# Altium PCB PanneauLed.PCBDOC
Units mm, origin at the board's own origin, x right, y up, seen from the top; angles counter-clockwise.
Board outline 299.72 x 199.9 mm, 2 copper layers (Top Layer, Bottom Layer); 100 components, 80 nets, 206 pads, 4 vias.
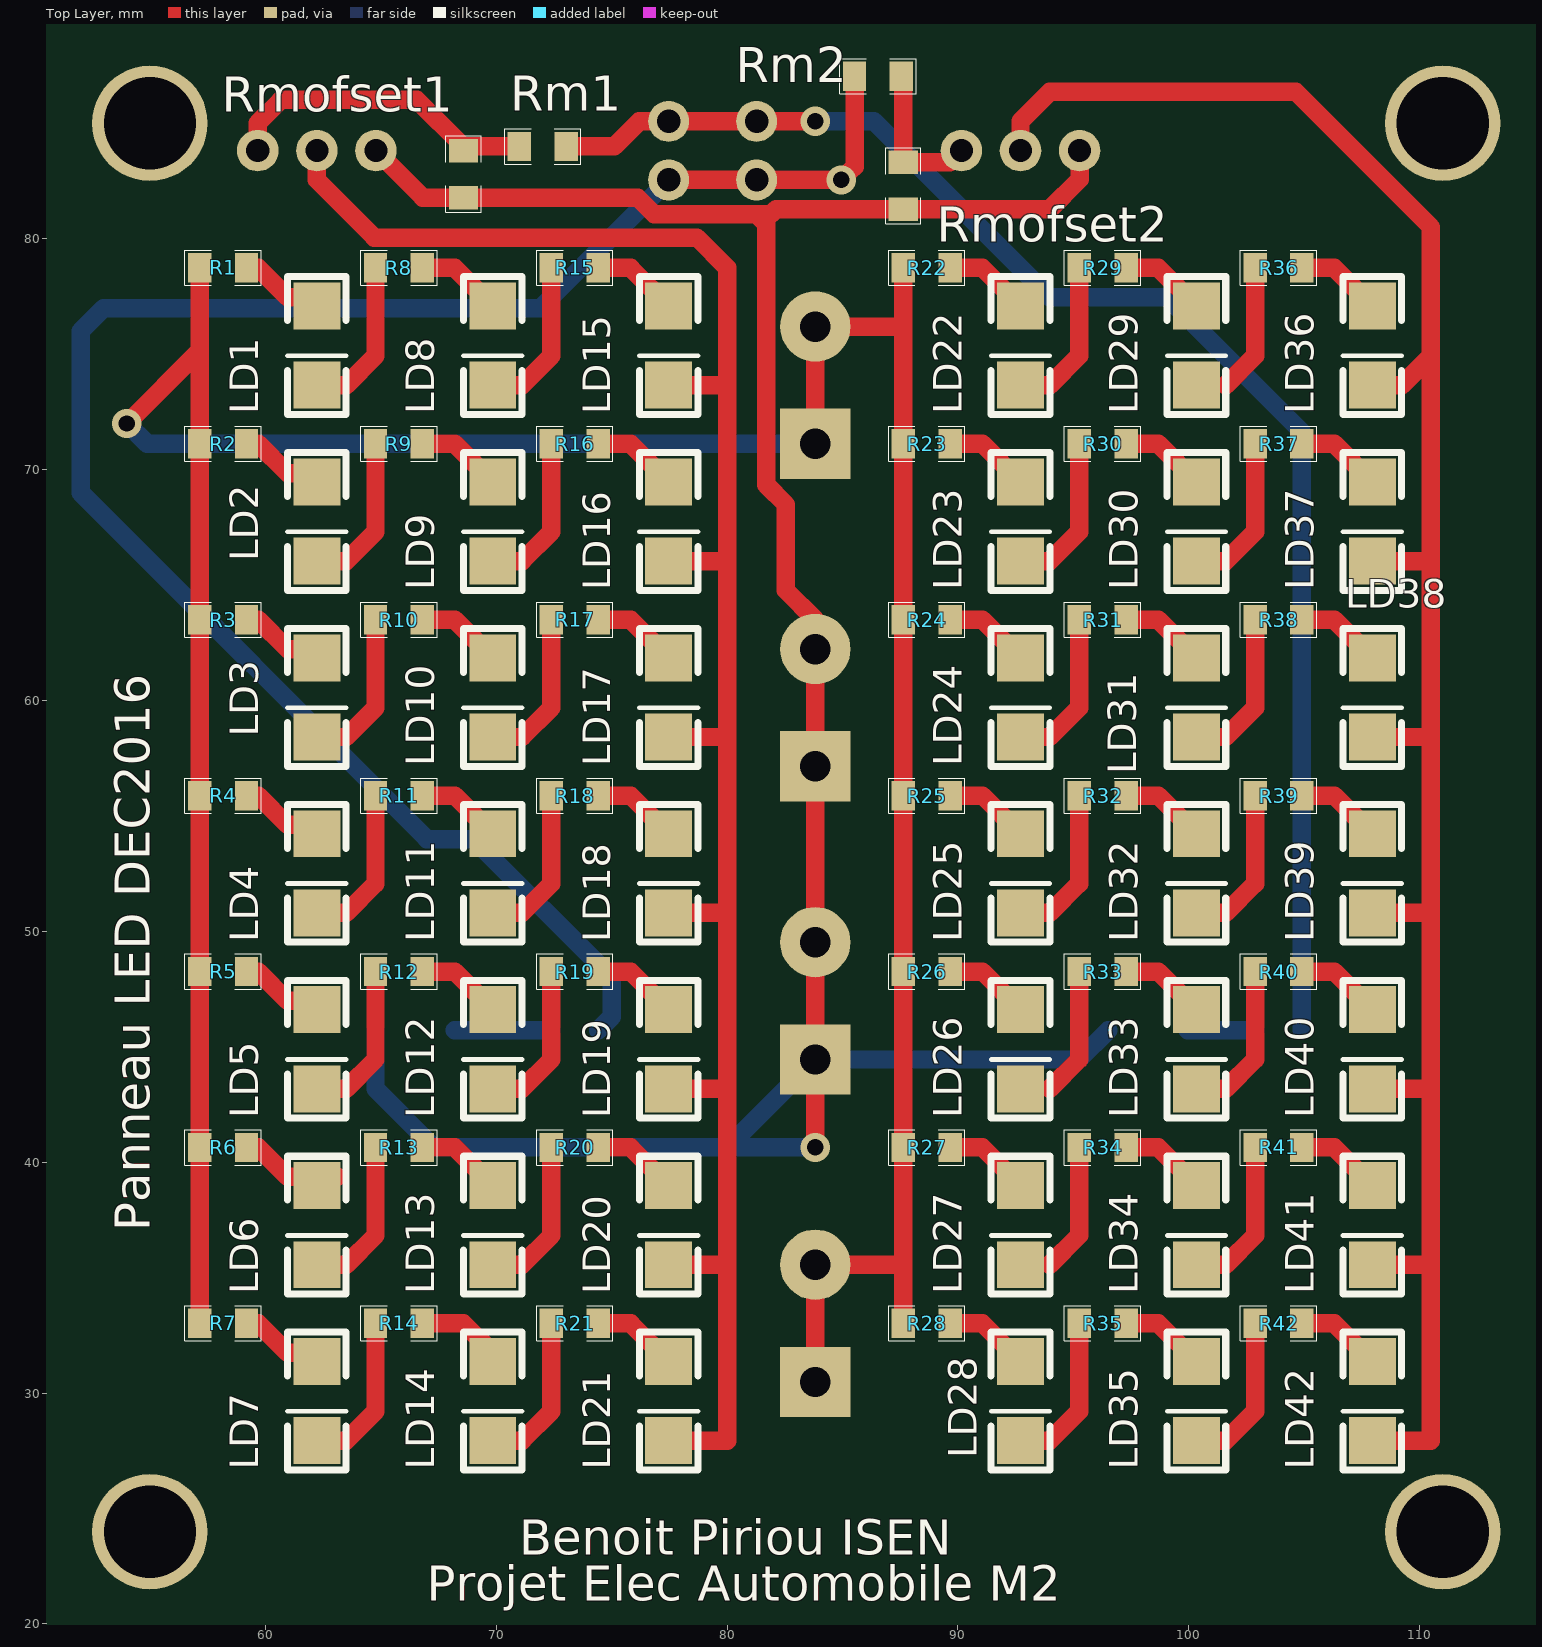
[diagram p0: Top Layer view]
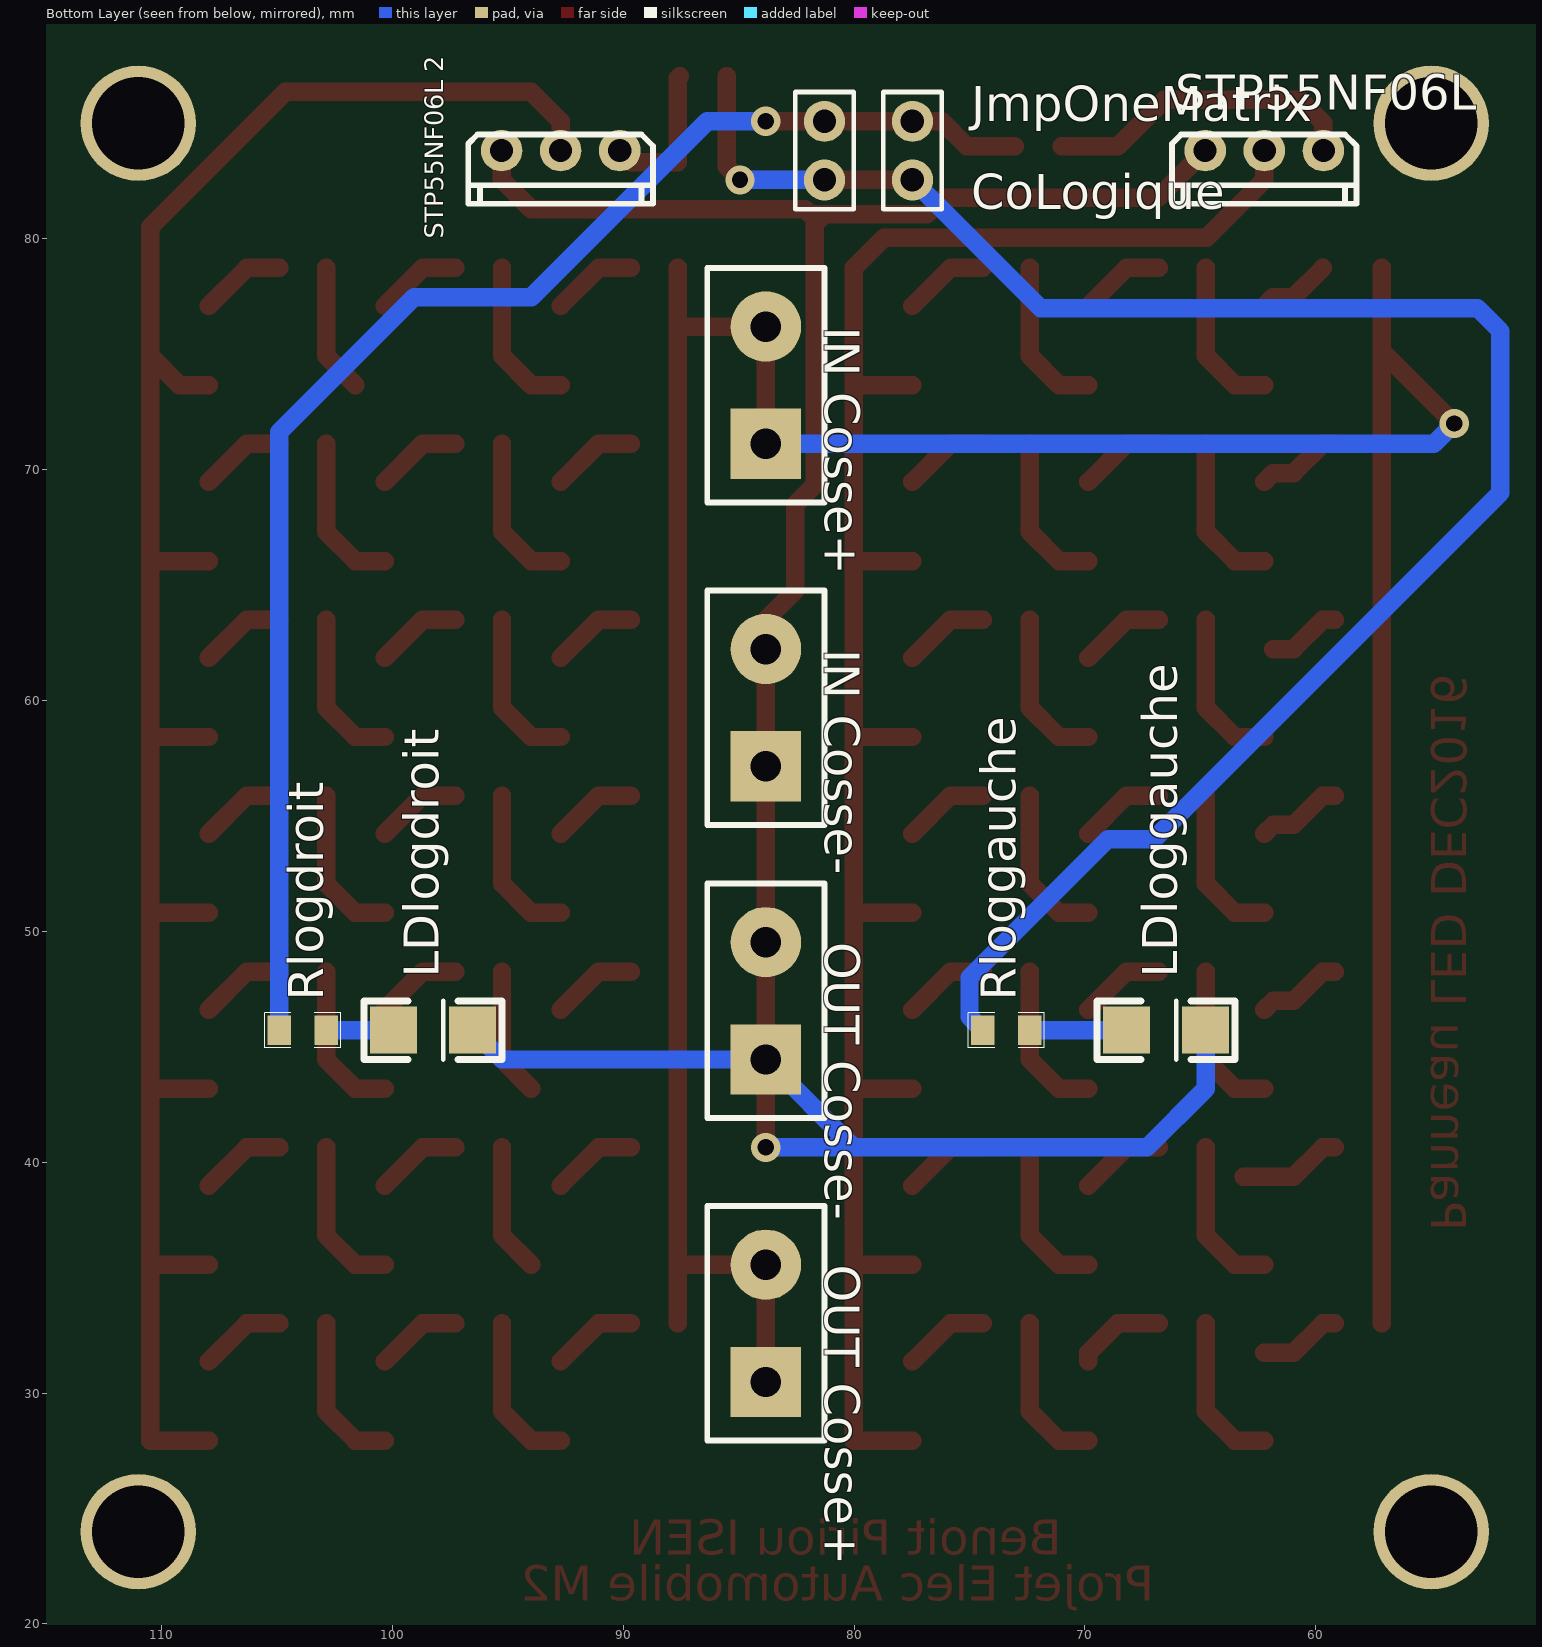
[diagram p1: Bottom Layer view, seen from below]

## Layer stack, top to bottom
Top Solder: solder mask 0.0102, Solder Resist, Dk 3.5
Top Layer: signal copper 0.0356
Dielectric1: dielectric 0.32, FR-4, Dk 4.8
Bottom Layer: signal copper 0.0356
Bottom Solder: solder mask 0.0102, Solder Resist, Dk 3.5

## Board outline
-20.497,-23.403 279.223,-23.403 279.223,176.495 -20.497,176.495

## Design rules (kind name [scope] priority, off if disabled: settings)
Clearance Clearance_bottom_polygon [OnLayer('Bottom Layer') Or OnLayer('Multi-Layer') vs OnLayer('Bottom Layer')  And  InPoly] p1: gap=0.508
Clearance Clearance_top_polygon [OnLayer('Top Layer')  Or OnLayer('Multi-Layer') vs OnLayer('Top Layer') And InPoly] p2: gap=0.508
Clearance Clearance_bottom [OnLayer('Bottom Layer') Or OnLayer('Multi-Layer') vs OnLayer('Bottom Layer')  And Not InPoly] p3: gap=0.203
Clearance Clearance_top [OnLayer('Top Layer')  Or OnLayer('Multi-Layer') vs OnLayer('Top Layer') And Not InPoly] p4: gap=0.203
Clearance Clearance_pad_to_pad [OnLayer('Multi-Layer') vs OnLayer('Multi-Layer')] p5: gap=0.254
ComponentClearance ComponentClearance_bottom [OnLayer('Bottom Overlay') vs OnLayer('Bottom Overlay')] p1: gap=0 collisioncheckmode=3 verticalgap=0.254 showdistances=FALSE
ComponentClearance ComponentClearance_top [OnLayer('Top Overlay') vs OnLayer('Top Overlay')] p2: gap=0 collisioncheckmode=3 verticalgap=0.254 showdistances=FALSE
FabricationTestPointUsage TestPointUsage [All] p1: valid=0 allowmultiple=FALSE
FabricationTestpoint Testpoint [All] p1: side=3 testpointundercomponent=TRUE minsize=1.016 maxsize=2.54 preferedsize=1.524 minholesize=0 maxholesize=1.016 preferedholesize=0.813 testpointgrid=0.025 allowsidetop=TRUE allowsidebottom=TRUE usegrid=TRUE gridtolerance=0
HoleSize [All] p1: absolutevalues=TRUE maxlimit=25.4 minlimit=0.406 maxpercent=80.000 minpercent=20.000
MinimumAnnularRing [PadXSize_AllLayers = PadYSize_AllLayers] p1: minimumring=0.203
PermittedLayers [All] p1: toplayerpermitted=TRUE bottomlayerpermitted=TRUE
PolygonConnect [All] p1: connectstyle=Relief reliefconductorwidth=0.61 reliefentries=4 polygonreliefangle="90 Angle" airgapwidth=0.254
RoutingVias [All] p1: holewidth=0.406 width=0.813 viastyle="Through Hole" minholewidth=0.4 minwidth=0.8 maxholewidth=0.6 maxwidth=10
SMDToPlane [All] p1: distance=0
SolderMaskExpansion [All] p1: expansion=0.102
ViasUnderSMD [All] p1: allowed=FALSE
Width Width_botom_top [OnLayer('Bottom Layer') or OnLayer('Top Layer')] p1: maxlimit=254 minlimit=0.254 preferedwidth=0.813 minimp=50.000000 maximp=50.000000 favimp=50.000000
25 further rules are at their usual default settings.

## Components (designator, comment, footprint, x,y, rotation, side; value= is the part's Value field where it differs from the comment)
CoLogique "JUMPER2" JMP2-100 77.47,85.09 r270 bottom
"IN Cosse+" "comment" POWER2 83.82,71.12 r90 bottom
"IN Cosse-" "comment" POWER2 83.82,57.15 r90 bottom
JmpOneMatrix "JUMPER2" JMP2-100 81.28,85.09 r270 bottom
LD1 "comment" LED1206 62.23,73.66 r90 top
LD2 "comment" LED1206 62.23,66.04 r90 top
LD3 "comment" LED1206 62.23,58.42 r90 top
LD4 "comment" LED1206 62.23,50.8 r90 top
LD5 "comment" LED1206 62.23,43.18 r90 top
LD6 "comment" LED1206 62.23,35.56 r90 top
LD7 "comment" LED1206 62.23,27.94 r90 top
LD8 "comment" LED1206 69.85,73.66 r90 top
LD9 "comment" LED1206 69.85,66.04 r90 top
LD10 "comment" LED1206 69.85,58.42 r90 top
LD11 "comment" LED1206 69.85,50.8 r90 top
LD12 "comment" LED1206 69.85,43.18 r90 top
LD13 "comment" LED1206 69.85,35.56 r90 top
LD14 "comment" LED1206 69.85,27.94 r90 top
LD15 "comment" LED1206 77.47,73.66 r90 top
LD16 "comment" LED1206 77.47,66.04 r90 top
LD17 "comment" LED1206 77.47,58.42 r90 top
LD18 "comment" LED1206 77.47,50.8 r90 top
LD19 "comment" LED1206 77.47,43.18 r90 top
LD20 "comment" LED1206 77.47,35.56 r90 top
LD21 "comment" LED1206 77.47,27.94 r90 top
LD22 "comment" LED1206 92.71,73.66 r90 top
LD23 "comment" LED1206 92.71,66.04 r90 top
LD24 "comment" LED1206 92.71,58.42 r90 top
LD25 "comment" LED1206 92.71,50.8 r90 top
LD26 "comment" LED1206 92.71,43.18 r90 top
LD27 "comment" LED1206 92.71,35.56 r90 top
LD28 "comment" LED1206 92.71,27.94 r90 top
LD29 "comment" LED1206 100.33,73.66 r90 top
LD30 "comment" LED1206 100.33,66.04 r90 top
LD31 "comment" LED1206 100.33,58.42 r90 top
LD32 "comment" LED1206 100.33,50.8 r90 top
LD33 "comment" LED1206 100.33,43.18 r90 top
LD34 "comment" LED1206 100.33,35.56 r90 top
LD35 "comment" LED1206 100.33,27.94 r90 top
LD36 "comment" LED1206 107.95,73.66 r90 top
LD37 "comment" LED1206 107.95,66.04 r90 top
LD38 "comment" LED1206 107.95,58.42 r90 top
LD39 "comment" LED1206 107.95,50.8 r90 top
LD40 "comment" LED1206 107.95,43.18 r90 top
LD41 "comment" LED1206 107.95,35.56 r90 top
LD42 "comment" LED1206 107.95,27.94 r90 top
LDlogdroit "comment" LED1206 96.52,45.72 r0 bottom
LDloggauche "comment" LED1206 64.77,45.72 r0 bottom
"OUT Cosse+" "" POWER2 83.82,30.48 r90 bottom
"OUT Cosse-" "comment" POWER2 83.82,44.45 r90 bottom
R1 "RES" 0805 57.15,78.74 r0 top
R2 "RES" 0805 57.15,71.12 r0 top
R3 "RES" 0805 57.15,63.5 r0 top
R4 "RES" 0805 57.15,55.88 r0 top
R5 "RES" 0805 57.15,48.26 r0 top
R6 "RES" 0805 57.15,40.64 r0 top
R7 "RES" 0805 57.15,33.02 r0 top
R8 "RES" 0805 64.77,78.74 r0 top
R9 "RES" 0805 64.77,71.12 r0 top
R10 "RES" 0805 64.77,63.5 r0 top
R11 "RES" 0805 64.77,55.88 r0 top
R12 "RES" 0805 64.77,48.26 r0 top
R13 "RES" 0805 64.77,40.64 r0 top
R14 "RES" 0805 64.77,33.02 r0 top
R15 "RES" 0805 72.39,78.74 r0 top
R16 "RES" 0805 72.39,71.12 r0 top
R17 "RES" 0805 72.39,63.5 r0 top
R18 "RES" 0805 72.39,55.88 r0 top
R19 "RES" 0805 72.39,48.26 r0 top
R20 "RES" 0805 72.39,40.64 r0 top
R21 "RES" 0805 72.39,33.02 r0 top
R22 "RES" 0805 87.63,78.74 r0 top
R23 "RES" 0805 87.63,71.12 r0 top
R24 "RES" 0805 87.63,63.5 r0 top
R25 "RES" 0805 87.63,55.88 r0 top
R26 "RES" 0805 87.63,48.26 r0 top
R27 "RES" 0805 87.63,40.64 r0 top
R28 "RES" 0805 87.63,33.02 r0 top
R29 "RES" 0805 95.25,78.74 r0 top
R30 "RES" 0805 95.25,71.12 r0 top
R31 "RES" 0805 95.25,63.5 r0 top
R32 "RES" 0805 95.25,55.88 r0 top
R33 "RES" 0805 95.25,48.26 r0 top
R34 "RES" 0805 95.25,40.64 r0 top
R35 "RES" 0805 95.25,33.02 r0 top
R36 "RES" 0805 102.87,78.74 r0 top
R37 "RES" 0805 102.87,71.12 r0 top
R38 "RES" 0805 102.87,63.5 r0 top
R39 "RES" 0805 102.87,55.88 r0 top
R40 "RES" 0805 102.87,48.26 r0 top
R41 "RES" 0805 102.87,40.64 r0 top
R42 "RES" 0805 102.87,33.02 r0 top
Rlogdroit "RES" 0805 102.87,45.72 r0 bottom
Rloggauche "RES" 0805 72.39,45.72 r0 bottom
Rm1 "RES" 0805 71,84 r0 top
Rm2 "RES" 0805 87.552,87.04 r180 top
Rmofset1 "RES" 0805 68.58,81.788 r90 top
Rmofset2 "RES" 0805 87.63,81.28 r90 top
STP55NF06L "STP55NF06L" STP55NF06L 62.23,83.82 r0 bottom
"STP55NF06L 2" "STP55NF06L" STP55NF06L 92.71,83.82 r0 bottom

## Footprints (in the part's own frame and the unit in brackets; to place one, negate y for a bottom-side part, rotate by r counter-clockwise, add the part's x,y. Pads: shape width x height; smd on the part's side, far side on the other; paste and mask are expansions set on the pad)
0805 [mil]
  rect 40x50 smd: 1(0,0) 2(80,0)
  silkscreen extent -25,-30 105,30
JMP2-100 [mil]
  round 70 hole 40: 1(0,0) 2(100,0)
  silkscreen extent -50,-50 150,50
LED1206 [mil]
  rect 80x80 smd: A(135,0) K(0,0)
  silkscreen extent -50,-50 185,50
POWER2 [mil]
  rect 120x120 hole 52: 1(0,0)
  round 120 hole 52: 2(200,0)
  silkscreen extent -100,-100 300,100
STP55NF06L [mm]
  round 1.8 hole 1: 1(-2.56,0) 2(0,0) 3(2.56,0)
  silkscreen extent -4,-0.7 4,2.3

## Part data
CoLogique JmpOneMatrix: "cavalier 1 position"
"IN Cosse+" "IN Cosse-" "OUT Cosse+" "OUT Cosse-": library part POWER2, "connecteur alim 2 pôles"
LD1 LD2 LD3 LD4 LD5 LD6 LD7 LD8 LD9 LD10 LD11 LD12 LD13 LD14 LD15 LD16 LD17 LD18 LD19 LD20 LD21 LD22 LD23 LD24 LD25 LD26 LD27 LD28 LD29 LD30 LD31 LD32 LD33 LD34 LD35 LD36 LD37 LD38 LD39 LD40 LD41 LD42 LDlogdroit LDloggauche: library part LED, "LED 5mm/3mm/CMS"
R1 R2 R3 R4 R5 R6 R7 R8 R9 R10 R11 R12 R13 R14 R15 R16 R17 R18 R19 R20 R21 R22 R23 R24 R25 R26 R27 R28 R29 R30 R31 R32 R33 R34 R35 R36 R37 R38 R39 R40 R41 R42 Rlogdroit Rloggauche Rm1 Rm2 Rmofset1 Rmofset2: "resistance"

## Free pads (board coordinates)
  round 5 hole 4: 0(55,24) 0(55,85) 0(111,24) 0(111,85)

## Via types
v1: diameter 1.27, hole 0.711, Top Layer to Bottom Layer, 4 vias

## Nets (pads, with @x,y where several pads share a name; then routed paths per layer and width w, separated by ;. In a path a pad name is that pad's centre, name@x,y a point inside that pad or via, vN(x,y) a via of type N, cw(c..) or ccw(c..) an arc to the next point about the centre after c; other vN are vias at no path point)
DDROIT: CoLogique.2 JmpOneMatrix.2 Rloggauche.2 Rm2.2 | length 85.4
  Top Layer w0.8: CoLogique.2 JmpOneMatrix.2 v1(84.941,82.55) 85.52,83.129 Rm2.2
  Bottom Layer w0.8: Rloggauche.2 75,46.298 75,48 69,54 67,54 52,69 52,76 53,77 71.92,77 CoLogique.2 ; JmpOneMatrix.2 v1(84.941,82.55) v1@85.016,82.476
DGAUCHE: CoLogique.1 JmpOneMatrix.1 Rlogdroit.2 Rm1.2 | length 63.8
  Top Layer w0.8: Rm1.2 75.11,84 76.2,85.09 CoLogique.1 JmpOneMatrix.1 v1(83.82,85.09)
  Bottom Layer w0.8: v1(83.82,85.09) 86.36,85.09 93.98,77.47 99.06,77.47 104.902,71.628 Rlogdroit.2
GND: "IN Cosse-.1" "IN Cosse-.2" "OUT Cosse-.1" "OUT Cosse-.2" "STP55NF06L 2.3" LDlogdroit.K LDloggauche.K Rmofset1.1 Rmofset2.1 STP55NF06L.3 | length 116.2
  Top Layer w0.8: STP55NF06L.3 66.822,81.788 Rmofset1.1 76.122,81.788 76.852,81.058 81.28,81.058 ; v1(83.82,40.64) 83.82,44.45 83.82,49.53 83.82,57.15 83.82,62.23 83.82,63.5 82.55,64.77 82.55,68.489 81.693,69.346 81.693,80.645 81.28,81.058 ; 95.27,83.82 95.27,82.57 93.98,81.28 Rmofset2.1 82.12,81.28 81.898,81.058 81.28,81.058
  Bottom Layer w0.8: LDloggauche.K 64.77,43.18 67.31,40.64 80.01,40.64 ; v1(83.82,40.64) 80.01,40.64 ; LDlogdroit.K 95.25,44.45 83.82,44.45 80.01,40.64
"GND DROIT": "STP55NF06L 2.2" LD36.K LD37.K LD38.K LD39.K LD40.K LD41.K LD42.K | length 92.9
  Top Layer w0.8: 92.71,83.82 92.71,85.09 93.98,86.36 104.64,86.36 110.49,80.51 110.49,74.93 ; LD42.K 110.49,27.94 110.49,35.56 ; LD41.K 110.49,35.56 ; LD40.K 110.49,43.18 ; LD39.K 110.49,50.8 ; LD38.K 110.49,58.42 ; LD37.K 110.49,66.04 ; LD36.K 109.22,73.66 110.49,74.93 ; 110.49,35.56 110.49,43.18 ; 110.49,43.18 110.49,50.8 ; 110.49,50.8 110.49,58.42 ; 110.49,58.42 110.49,66.04 ; 110.49,66.04 110.49,74.93
"GND GAUCHE": LD15.K LD16.K LD17.K LD18.K LD19.K LD20.K LD21.K STP55NF06L.2 | length 89.2
  Top Layer w0.8: STP55NF06L.2 62.23,82.55 64.725,80.055 78.695,80.055 80.01,78.74 80.01,73.66 ; LD21.K 80.01,27.94 80.01,35.56 ; LD20.K 80.01,35.56 ; LD19.K 80.01,43.18 ; LD18.K 80.01,50.8 ; LD17.K 80.01,58.42 ; LD16.K 80.01,66.04 ; LD15.K 80.01,73.66 ; 80.01,35.56 80.01,43.18 ; 80.01,43.18 80.01,50.8 ; 80.01,50.8 80.01,58.42 ; 80.01,58.42 80.01,66.04 ; 80.01,66.04 80.01,73.66
NetLD1_A: LD1.A R1.2 | length 3.2
  Top Layer w0.8: 59.69,78.74 60.96,77.47 61.849,77.47 LD1.A
NetLD1_K: LD1.K R8.1 | length 6.9
  Top Layer w0.8: LD1.K 63.5,73.66 64.77,74.93 R8.1
NetLD2_A: LD2.A R2.2 | length 3.7
  Top Layer w0.8: R2.2 59.69,71.12 60.96,69.85 61.849,69.85 LD2.A
NetLD2_K: LD2.K R9.1 | length 6.9
  Top Layer w0.8: LD2.K 63.5,66.04 64.77,67.31 R9.1
NetLD3_A: LD3.A R3.2 | length 3.2
  Top Layer w0.8: R3.2 59.69,63.5 60.96,62.23 LD3.A@61.849,62.23
NetLD3_K: LD3.K R10.1 | length 6.9
  Top Layer w0.8: LD3.K 63.5,58.42 64.77,59.69 R10.1
NetLD4_A: LD4.A R4.2 | length 3.7
  Top Layer w0.8: R4.2 59.69,55.88 60.96,54.61 61.849,54.61 LD4.A
NetLD4_K: LD4.K R11.1 | length 6.9
  Top Layer w0.8: LD4.K 63.5,50.8 64.77,52.07 R11.1
NetLD5_A: LD5.A R5.2 | length 3.7
  Top Layer w0.8: R5.2 59.69,48.26 60.96,46.99 61.849,46.99 LD5.A
NetLD5_K: LD5.K R12.1 | length 6.9
  Top Layer w0.8: LD5.K 63.5,43.18 64.77,44.45 R12.1
NetLD6_A: LD6.A R6.2 | length 4.5
  Top Layer w0.8: R6.2 59.69,40.64 60.96,39.37 LD6.A@63.119,39.37
NetLD6_K: LD6.K R13.1 | length 6.9
  Top Layer w0.8: LD6.K 63.5,35.56 64.77,36.83 R13.1
NetLD7_A: LD7.A R7.2 | length 3.6
  Top Layer w0.8: R7.2 59.69,33.02 60.96,31.75 LD7.A@62.23,31.75
NetLD7_K: LD7.K R14.1 | length 6.9
  Top Layer w0.8: LD7.K 63.5,27.94 64.77,29.21 R14.1
NetLD8_A: LD8.A R8.2 | length 3.7
  Top Layer w0.8: R8.2 68.199,78.74 LD8.A
NetLD8_K: LD8.K R15.1 | length 6.9
  Top Layer w0.8: LD8.K 71.12,73.66 72.39,74.93 R15.1
NetLD9_A: LD9.A R9.2 | length 3.7
  Top Layer w0.8: R9.2 68.199,71.12 LD9.A
NetLD9_K: LD9.K R16.1 | length 6.9
  Top Layer w0.8: LD9.K 71.12,66.04 72.39,67.31 R16.1
NetLD10_A: LD10.A R10.2 | length 3.7
  Top Layer w0.8: R10.2 68.199,63.5 LD10.A
NetLD10_K: LD10.K R17.1 | length 6.9
  Top Layer w0.8: LD10.K 71.12,58.42 72.39,59.69 R17.1
NetLD11_A: LD11.A R11.2 | length 3.7
  Top Layer w0.8: R11.2 68.199,55.88 LD11.A
NetLD11_K: LD11.K R18.1 | length 6.9
  Top Layer w0.8: LD11.K 71.12,50.8 72.39,52.07 R18.1
NetLD12_A: LD12.A R12.2 | length 3.7
  Top Layer w0.8: R12.2 68.199,48.26 LD12.A
NetLD12_K: LD12.K R19.1 | length 6.9
  Top Layer w0.8: LD12.K 71.12,43.18 72.39,44.45 R19.1
NetLD13_A: LD13.A R13.2 | length 3.7
  Top Layer w0.8: R13.2 68.199,40.64 LD13.A
NetLD13_K: LD13.K R20.1 | length 6.9
  Top Layer w0.8: LD13.K 71.12,35.56 72.39,36.83 R20.1
NetLD14_A: LD14.A R14.2 | length 4
  Top Layer w0.8: R14.2 68.58,33.02 69.85,31.75 LD14.A
NetLD14_K: LD14.K R21.1 | length 6.9
  Top Layer w0.8: LD14.K 71.12,27.94 72.39,29.21 R21.1
NetLD15_A: LD15.A R15.2 | length 3.7
  Top Layer w0.8: R15.2 75.819,78.74 LD15.A
NetLD16_A: LD16.A R16.2 | length 3.7
  Top Layer w0.8: R16.2 75.819,71.12 LD16.A
NetLD17_A: LD17.A R17.2 | length 3.7
  Top Layer w0.8: R17.2 75.819,63.5 LD17.A
NetLD18_A: LD18.A R18.2 | length 3.7
  Top Layer w0.8: R18.2 75.819,55.88 LD18.A
NetLD19_A: LD19.A R19.2 | length 3.7
  Top Layer w0.8: R19.2 75.819,48.26 LD19.A
NetLD20_A: LD20.A R20.2 | length 3.7
  Top Layer w0.8: R20.2 75.819,40.64 LD20.A
NetLD21_A: LD21.A R21.2 | length 3.7
  Top Layer w0.8: R21.2 75.819,33.02 LD21.A
NetLD22_A: LD22.A R22.2 | length 3.7
  Top Layer w0.8: R22.2 91.059,78.74 LD22.A
NetLD22_K: LD22.K R29.1 | length 6.9
  Top Layer w0.8: LD22.K 93.98,73.66 95.25,74.93 R29.1
NetLD23_A: LD23.A R23.2 | length 3.7
  Top Layer w0.8: R23.2 91.059,71.12 LD23.A
NetLD23_K: LD23.K R30.1 | length 6.9
  Top Layer w0.8: LD23.K 93.98,66.04 95.25,67.31 R30.1
NetLD24_A: LD24.A R24.2 | length 3.7
  Top Layer w0.8: R24.2 91.059,63.5 LD24.A
NetLD24_K: LD24.K R31.1 | length 6.9
  Top Layer w0.8: LD24.K 93.98,58.42 95.25,59.69 R31.1
NetLD25_A: LD25.A R25.2 | length 3.7
  Top Layer w0.8: R25.2 91.059,55.88 LD25.A
NetLD25_K: LD25.K R32.1 | length 6.9
  Top Layer w0.8: LD25.K 93.98,50.8 95.25,52.07 R32.1
NetLD26_A: LD26.A R26.2 | length 3.7
  Top Layer w0.8: R26.2 91.059,48.26 LD26.A
NetLD26_K: LD26.K R33.1 | length 5.6
  Top Layer w0.8: 93.98,43.18 95.25,44.45 R33.1
NetLD27_A: LD27.A R27.2 | length 3.7
  Top Layer w0.8: R27.2 91.059,40.64 LD27.A
NetLD27_K: LD27.K R34.1 | length 5.6
  Top Layer w0.8: 93.98,35.56 95.25,36.83 R34.1
NetLD28_A: LD28.A R28.2 | length 3.7
  Top Layer w0.8: R28.2 91.059,33.02 LD28.A
NetLD28_K: LD28.K R35.1 | length 6.9
  Top Layer w0.8: LD28.K 93.98,27.94 95.25,29.21 R35.1
NetLD29_A: LD29.A R29.2 | length 3.7
  Top Layer w0.8: R29.2 98.679,78.74 LD29.A
NetLD29_K: LD29.K R36.1 | length 5.6
  Top Layer w0.8: 101.6,73.66 102.87,74.93 R36.1
NetLD30_A: LD30.A R30.2 | length 3.7
  Top Layer w0.8: R30.2 98.679,71.12 LD30.A
NetLD30_K: LD30.K R37.1 | length 6.9
  Top Layer w0.8: LD30.K 101.6,66.04 102.87,67.31 R37.1
NetLD31_A: LD31.A R31.2 | length 3.7
  Top Layer w0.8: R31.2 98.679,63.5 LD31.A
NetLD31_K: LD31.K R38.1 | length 6.9
  Top Layer w0.8: LD31.K 101.6,58.42 102.87,59.69 R38.1
NetLD32_A: LD32.A R32.2 | length 3.7
  Top Layer w0.8: R32.2 98.679,55.88 LD32.A
NetLD32_K: LD32.K R39.1 | length 6.9
  Top Layer w0.8: LD32.K 101.6,50.8 102.87,52.07 R39.1
NetLD33_A: LD33.A R33.2 | length 3.7
  Top Layer w0.8: R33.2 98.679,48.26 LD33.A
NetLD33_K: LD33.K R40.1 | length 6.9
  Top Layer w0.8: LD33.K 101.6,43.18 102.87,44.45 R40.1
NetLD34_A: LD34.A R34.2 | length 3.7
  Top Layer w0.8: R34.2 98.679,40.64 LD34.A
NetLD34_K: LD34.K R41.1 | length 6.9
  Top Layer w0.8: LD34.K 101.6,35.56 102.87,36.83 R41.1
NetLD35_A: LD35.A R35.2 | length 3.7
  Top Layer w0.8: R35.2 98.679,33.02 LD35.A
NetLD35_K: LD35.K R42.1 | length 6.9
  Top Layer w0.8: LD35.K 101.6,27.94 102.87,29.21 R42.1
NetLD36_A: LD36.A R36.2 | length 3.7
  Top Layer w0.8: R36.2 106.299,78.74 LD36.A
NetLD37_A: LD37.A R37.2 | length 3.7
  Top Layer w0.8: R37.2 106.299,71.12 LD37.A
NetLD38_A: LD38.A R38.2 | length 3.7
  Top Layer w0.8: R38.2 106.299,63.5 LD38.A
NetLD39_A: LD39.A R39.2 | length 3.7
  Top Layer w0.8: R39.2 106.299,55.88 LD39.A
NetLD40_A: LD40.A R40.2 | length 3.7
  Top Layer w0.8: R40.2 106.299,48.26 LD40.A
NetLD41_A: LD41.A R41.2 | length 3.7
  Top Layer w0.8: R41.2 106.299,40.64 LD41.A
NetLD42_A: LD42.A R42.2 | length 3.7
  Top Layer w0.8: R42.2 106.299,33.02 LD42.A
NetLDlogdroit_A: LDlogdroit.A Rlogdroit.1 | length 2.9
  Bottom Layer w0.8: LDlogdroit.A Rlogdroit.1
NetLDloggauche_A: LDloggauche.A Rloggauche.1 | length 4.2
  Bottom Layer w0.8: LDloggauche.A Rloggauche.1
NetRm1_1: Rm1.1 Rmofset1.2 STP55NF06L.1 | length 13.8
  Top Layer w0.8: STP55NF06L.1 59.67,85.014 60.672,86.016 66.56,86.016 68.576,84 Rm1.1
NetRm2_1: "STP55NF06L 2.1" Rm2.1 Rmofset2.2 | length 7
  Top Layer w0.8: Rm2.1 87.63,86.962 Rmofset2.2 89.642,83.312 90.15,83.82 90.15,84.281
VCC12V: "IN Cosse+.1" "IN Cosse+.2" "OUT Cosse+.1" "OUT Cosse+.2" R1.1 R2.1 R3.1 R4.1 R5.1 R6.1 R7.1 R22.1 R23.1 R24.1 R25.1 R26.1 R27.1 R28.1 | length 143.9
  Top Layer w0.8: v1(54,72) 57.15,75.15 ; R7.1 R3.1 R2.1 57.15,75.15 ; R1.1 57.15,75.15 ; 83.82,30.48 83.82,35.56 87.63,35.56 ; 83.82,71.12 83.82,76.2 87.63,76.2 ; R28.1 87.63,35.56 ; R22.1 87.63,76.2 ; 87.63,35.56 R27.1 R26.1 R25.1 R24.1 R23.1 87.63,76.2
  Bottom Layer w0.8: v1(54,72) 54.88,71.12 83.82,71.12

## Other copper
Top Layer:
  text "Panneau LED DEC2016" at 55,37 h1.52 r90
  text "Benoit Piriou ISEN" at 71,23 h1.52
  text "Projet Elec Automobile M2" at 67,21 h1.52

## Silkscreen, mask and mechanical layers (free items; w line width, h text height)
Top Overlay:
  text "Panneau LED DEC2016" at 55,37 h1.52 r90
  text "Benoit Piriou ISEN" at 71,23 h1.52
  text "Projet Elec Automobile M2" at 67,21 h1.52
Mechanical 1:
  lines w0.254: 51,30 51,87 53,89 56,89 113,89 115,87 115,28 ; 51,30 51,22 53,20 113,20 115,22 115,28 ; 51,30 51,30 ; 115,28 115,28
Mechanical 2:
  lines w0.254: 51,91.746 51,92.254 ; 52.524,91.492 51,92 ; 52.524,92.508 51,92 ; 77.896,92 51,92 ; 88.104,92 115,92 ; 113.476,91.492 115,92 ; 113.476,92.508 115,92 ; 115,91.746 115,92.254 ; 116.492,21.524 117,20 ; 116.492,87.476 117,89 ; 116.746,20 117.254,20 ; 116.746,89 117.254,89 ; 117,49.396 117,20 ; 117,59.604 117,89 ; 117.508,21.524 117,20 ; 117.508,87.476 117,89
  text "64 (mm)" at 78.15,91.086 h1.52
  text "69 (mm)" at 117.914,49.65 h1.52 r90